# EAGLE board vga-pal_gnd_plane (EAGLE 6.6.0)
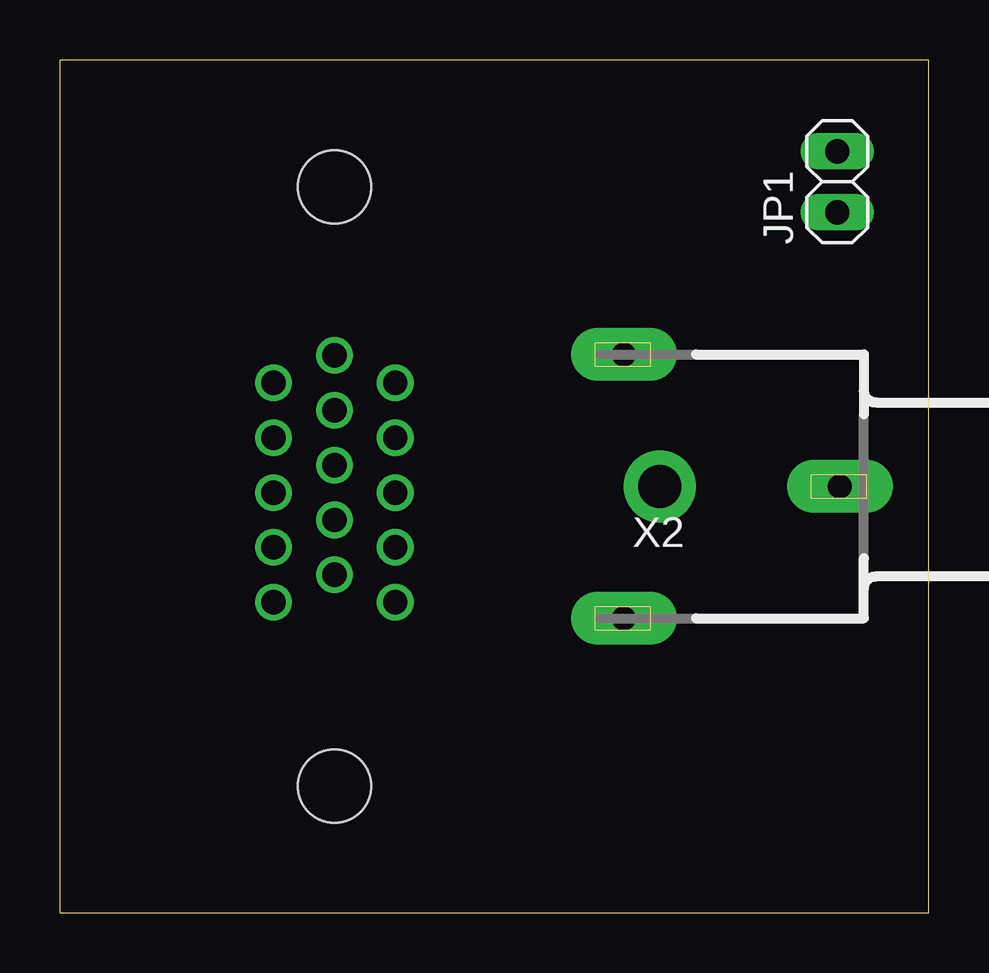
[diagram p0: board, top side]
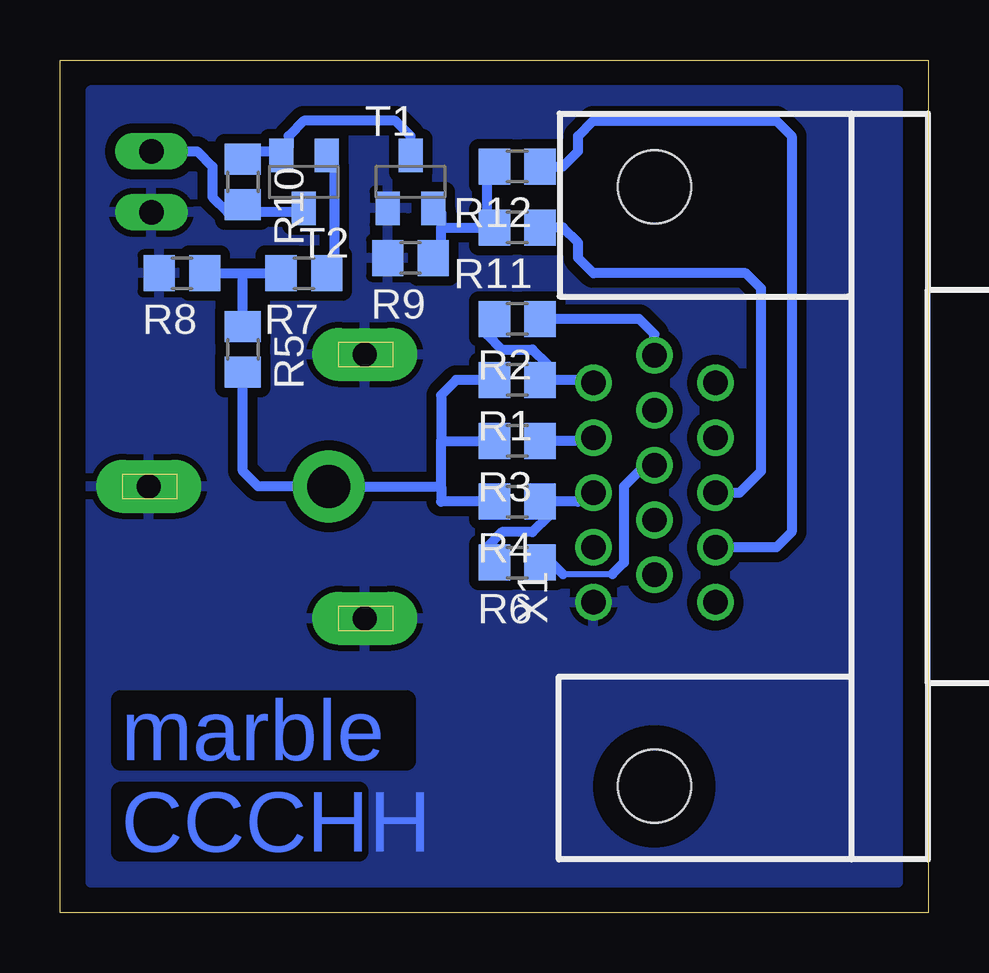
[diagram p1: board, bottom side, seen from below]

Size 36.2 x 35.56 mm. Coordinates in mm from the lower left corner, seen from the top.
Outline: 0,0 36.2,0 36.2,35.56 0,35.56 0,0
Copper layers (1*16): Top 0.035mm / dielectric 1.5mm / Bottom 0.035mm
Design rules "default": minimum track width 10mil, minimum drill 24mil, track to track 8mil, track to pad 8mil, pad to pad 8mil, via to via 8mil, smd to smd 8mil, copper to edge 40mil, drill to drill 8mil, minimum pad ring 10mil, minimum via ring 8mil, stop-mask expansion 4mil, vias tented up to drill 0mil, thermal gap 10mil

## Footprints (pad centres in the part's own frame; a part is rotated, then mirrored left to right if it is on the bottom)
1X02 = drill 1.016 long: 1 -1.27,0; 2 1.27,0
R0805 = smd 1.3 x 1.5: 1 -0.95,0; 2 0.95,0
SOT23-EBC = smd 1 x 1.4: B 0.95,-1.1; C 0,1.1; E -0.95,-1.1
HDR15RA = drill 1.016: 1 4.318,2.54; 2 2.032,2.54; 3 -0.254,2.54; 4 -2.54,2.54; 5 -4.826,2.54; 6 5.461,0; 7 3.175,0; 8 0.889,0; 9 -1.397,0; 10 -3.683,0; 11 4.318,-2.54; 12 2.032,-2.54; 13 -0.254,-2.54; 14 -2.54,-2.54; 15 -4.826,-2.54 | hole 3.048: -12.497,0; 12.497,0
736880-49 = drill 1 pad 2.2 long: 1 -3.92,0; 1@1 5.08,-5.5; 1@2 5.08,5.5 | drill 1.8 pad 3: 2 3.58,0

## Placement (x,y rotation side)
JP1  PSU  [1X02]  32.38,30.48 90 top
R1  82  [R0805]  17.14,22.23 180 bottom
R2  180  [R0805]  17.14,24.77 180 bottom
R3  22  [R0805]  17.14,19.68 180 bottom
R4  220  [R0805]  17.14,17.14 180 bottom
R5  100  [R0805]  28.57,23.5 270 bottom
R6  100  [R0805]  17.14,14.61 180 bottom
R7  68  [R0805]  26.04,26.67 180 bottom
R8  68  [R0805]  31.11,26.67 180 bottom
R9  1.8k  [R0805]  21.59,27.3 180 bottom
R10  2.7k  [R0805]  28.57,30.48 270 bottom
R11  1.8k  [R0805]  17.14,28.57 180 bottom
R12  1.8k  [R0805]  17.14,31.11 180 bottom
T1  [SOT23-EBC]  21.59,30.48 0 bottom
T2  [SOT23-EBC]  26.04,30.48 180 bottom
X1  D-SUB15-HDR15RA  [HDR15RA]  11.43,17.78 90 bottom
X2  736880-49  [736880-49]  28.57,17.78 180 top

## Library data of the parts
JP1 = pinhead
R1-R12 = rcl
T1 T2 = transistor
X1 = con-thomas-betts; OC_FARNELL: unknown; OC_NEWARK: unknown
X2 = con-conrad

## Nets
B_GND: R6.1 X1.8
BLU: R4.1 R6.2 X1.3
GND: JP1.1 R8.2 R9.2 T1.E X1.5 X2.1 X2.1@1 X2.1@2
GRN: R3.1 X1.2
H_SYNC: R11.1 X1.13
N$4: R1.2 R3.2 R4.2 R5.2 X2.2
N$7: R5.1 R7.2 R8.1
N$9: R9.1 R11.2 R12.2 T1.B
N$14: R10.1 T1.C T2.B
N$15: R7.1 T2.E
R_GND: R2.1 X1.6
RED: R1.1 R2.2 X1.1
V_SYNC: R12.1 X1.14
VCC: JP1.2 R10.2 T2.C

## Tracks (layer width: path | path; a pad name or v marks a point on that pad's centre or on a via)
B_GND
  Bottom 0.254: 15.24,14.13 13.18,14.13
  Bottom 0.406: R6.1 15.72,14.61 15.24,14.13 | 13.18,14.13 12.7,14.61 12.7,17.78 11.81,18.67 X1.8
BLU
  Bottom 0.406: X1.3 14.22,17.53 14.61,17.14 15.88,17.14 | R4.1 15.88,17.14 | 15.88,17.14 15.88,16.51 16.51,15.88 17.78,15.88 18.41,15.24 18.41,14.61 R6.2
GND
  pour Bottom (isolate 0.406): 1.27,34.29 34.92,34.29 34.92,1.27 1.27,1.27
GRN
  Bottom 0.406: X1.2 14.48,19.81 14.61,19.68 R3.1
H_SYNC
  Bottom 0.406: X1.13 7.87,17.53 6.99,18.41 6.99,26.04 7.62,26.67 13.97,26.67 14.61,27.3 14.61,27.94 15.24,28.57 R11.1
N$4
  Bottom 0.406: R1.2 19.68,22.23 20.32,21.59 20.32,19.68 | 20.32,19.68 R3.2 | R4.2 20.32,17.14 20.32,17.78 | 20.32,17.78 20.32,19.68 | 20.32,17.78 X2.2 27.94,17.78 28.57,18.41 R5.2
N$7
  Bottom 0.406: R8.1 28.57,26.67 | 28.57,26.67 R7.2 | R5.1 28.57,26.67
N$9
  Bottom 0.406: T1.B 20.64,29.21 20.32,29.21 20.32,28.57 | R9.1 20.32,27.3 20.32,28.57 | R12.2 18.41,31.11 18.41,28.57 | 20.32,28.57 18.41,28.57 | 18.41,28.57 R11.2
N$14
  Bottom 0.406: R10.1 28.57,31.75 26.98,31.75 T2.B 26.67,31.89 26.67,32.38 26.04,33.02 22.23,33.02 21.59,32.38 T1.C
N$15
  Bottom 0.406: R7.1 24.77,26.67 24.77,31.11 25.09,31.43 T2.E
R_GND
  Bottom 0.406: X1.6 11.43,24.13 12.06,24.77 R2.1
RED
  Bottom 0.406: X1.1 14.48,22.1 14.61,22.23 15.88,22.23 | R1.1 15.88,22.23 | 15.88,22.23 15.88,22.86 16.51,23.5 17.78,23.5 18.41,24.13 18.41,24.77 R2.2
V_SYNC
  Bottom 0.406: R12.1 15.24,31.11 14.61,31.75 14.61,32.38 13.97,33.02 6.35,33.02 5.71,32.38 5.71,15.88 6.35,15.24 X1.14
VCC
  Bottom 0.406: T2.C 26.04,29.21 28.57,29.21 | JP1.2 30.48,31.75 29.84,31.11 29.84,29.84 29.21,29.21 28.57,29.21 | 28.57,29.21 R10.2

## Text on the board
Bottom: marble | CCCHH